# EAGLE board bird_beaks 3.0 (EAGLE 9.6.2)
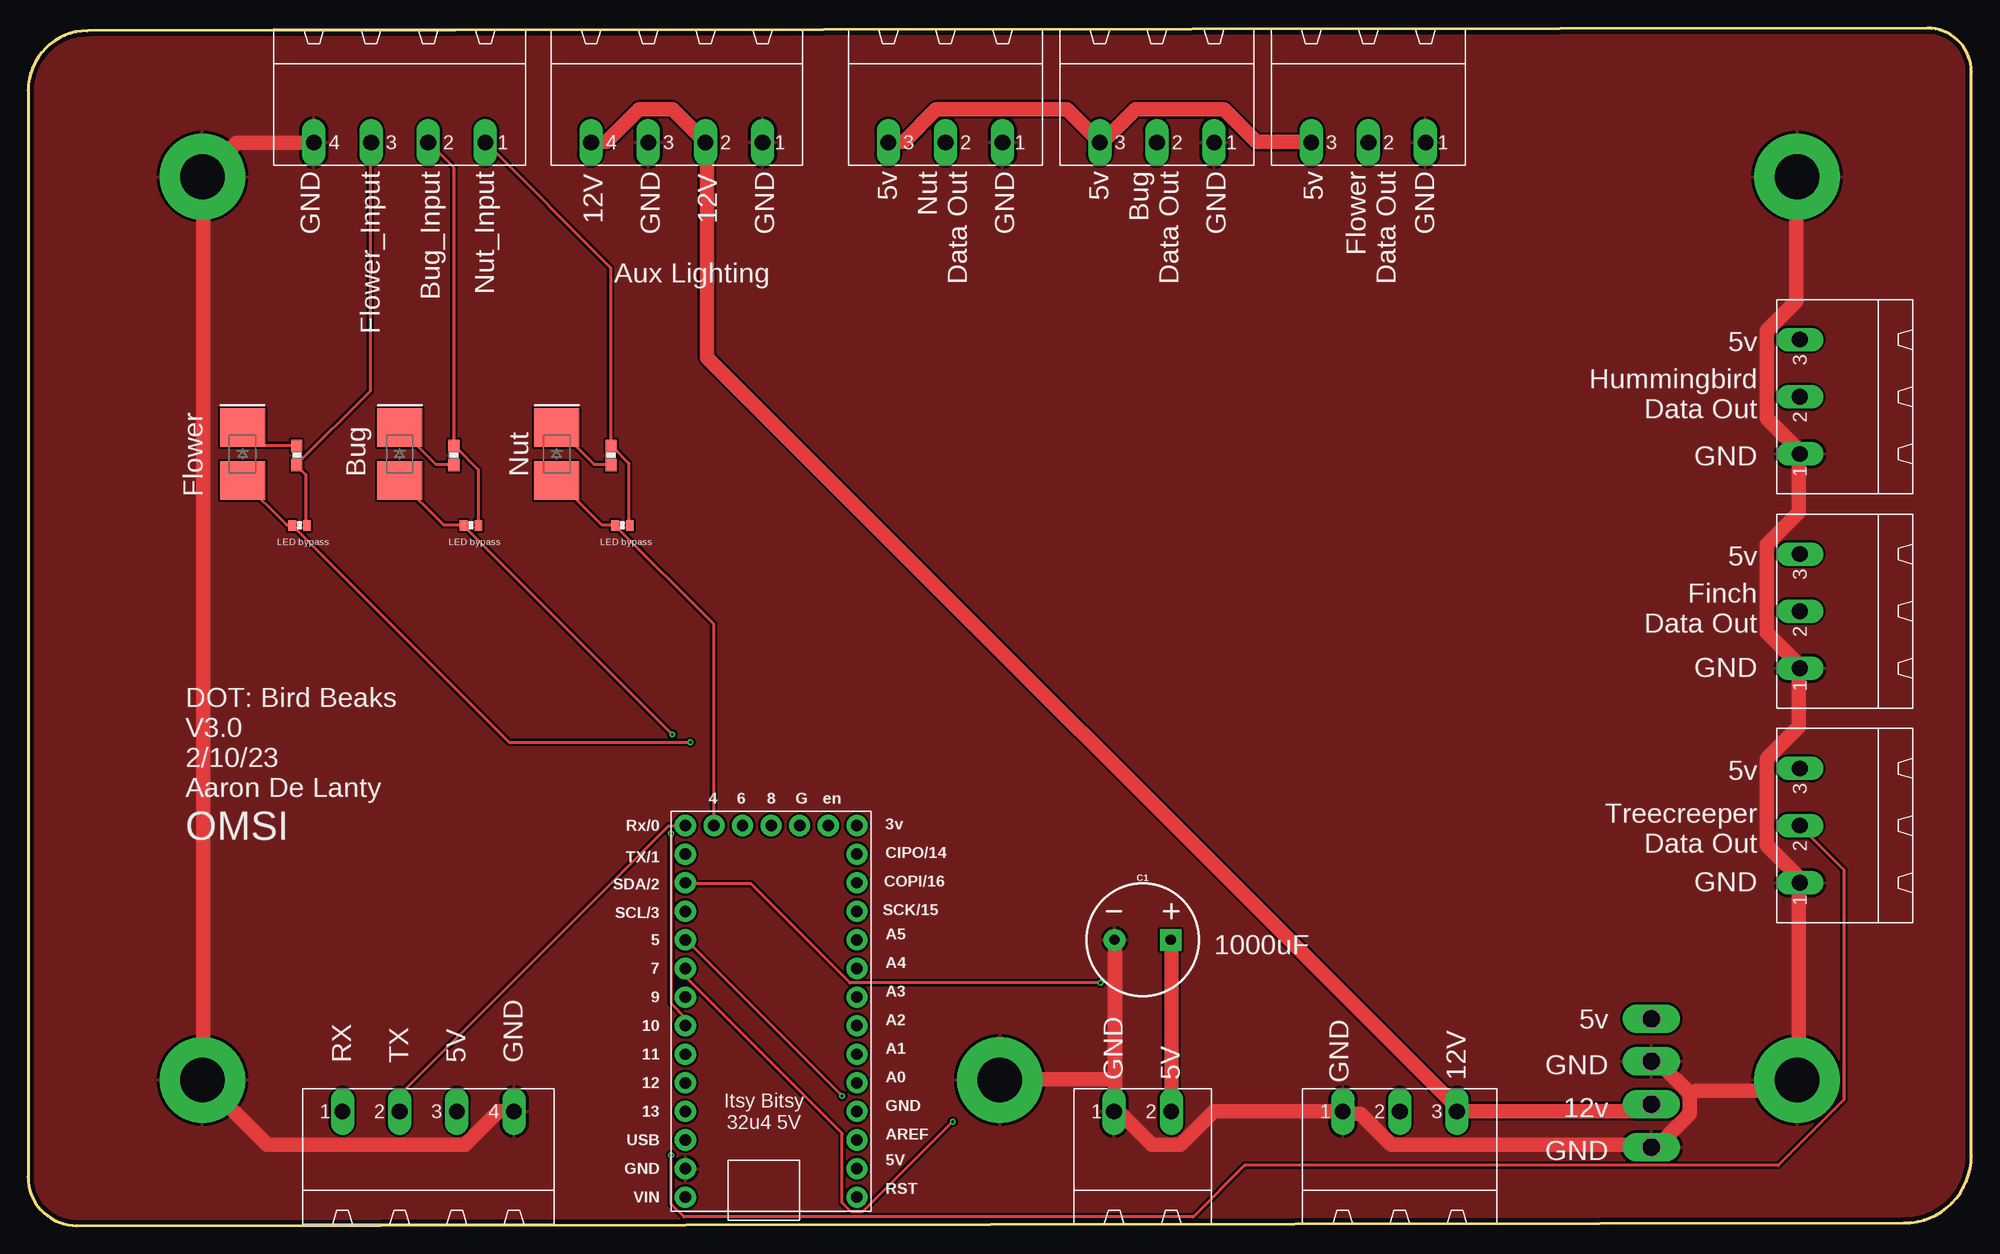
[diagram p0: board, top side]
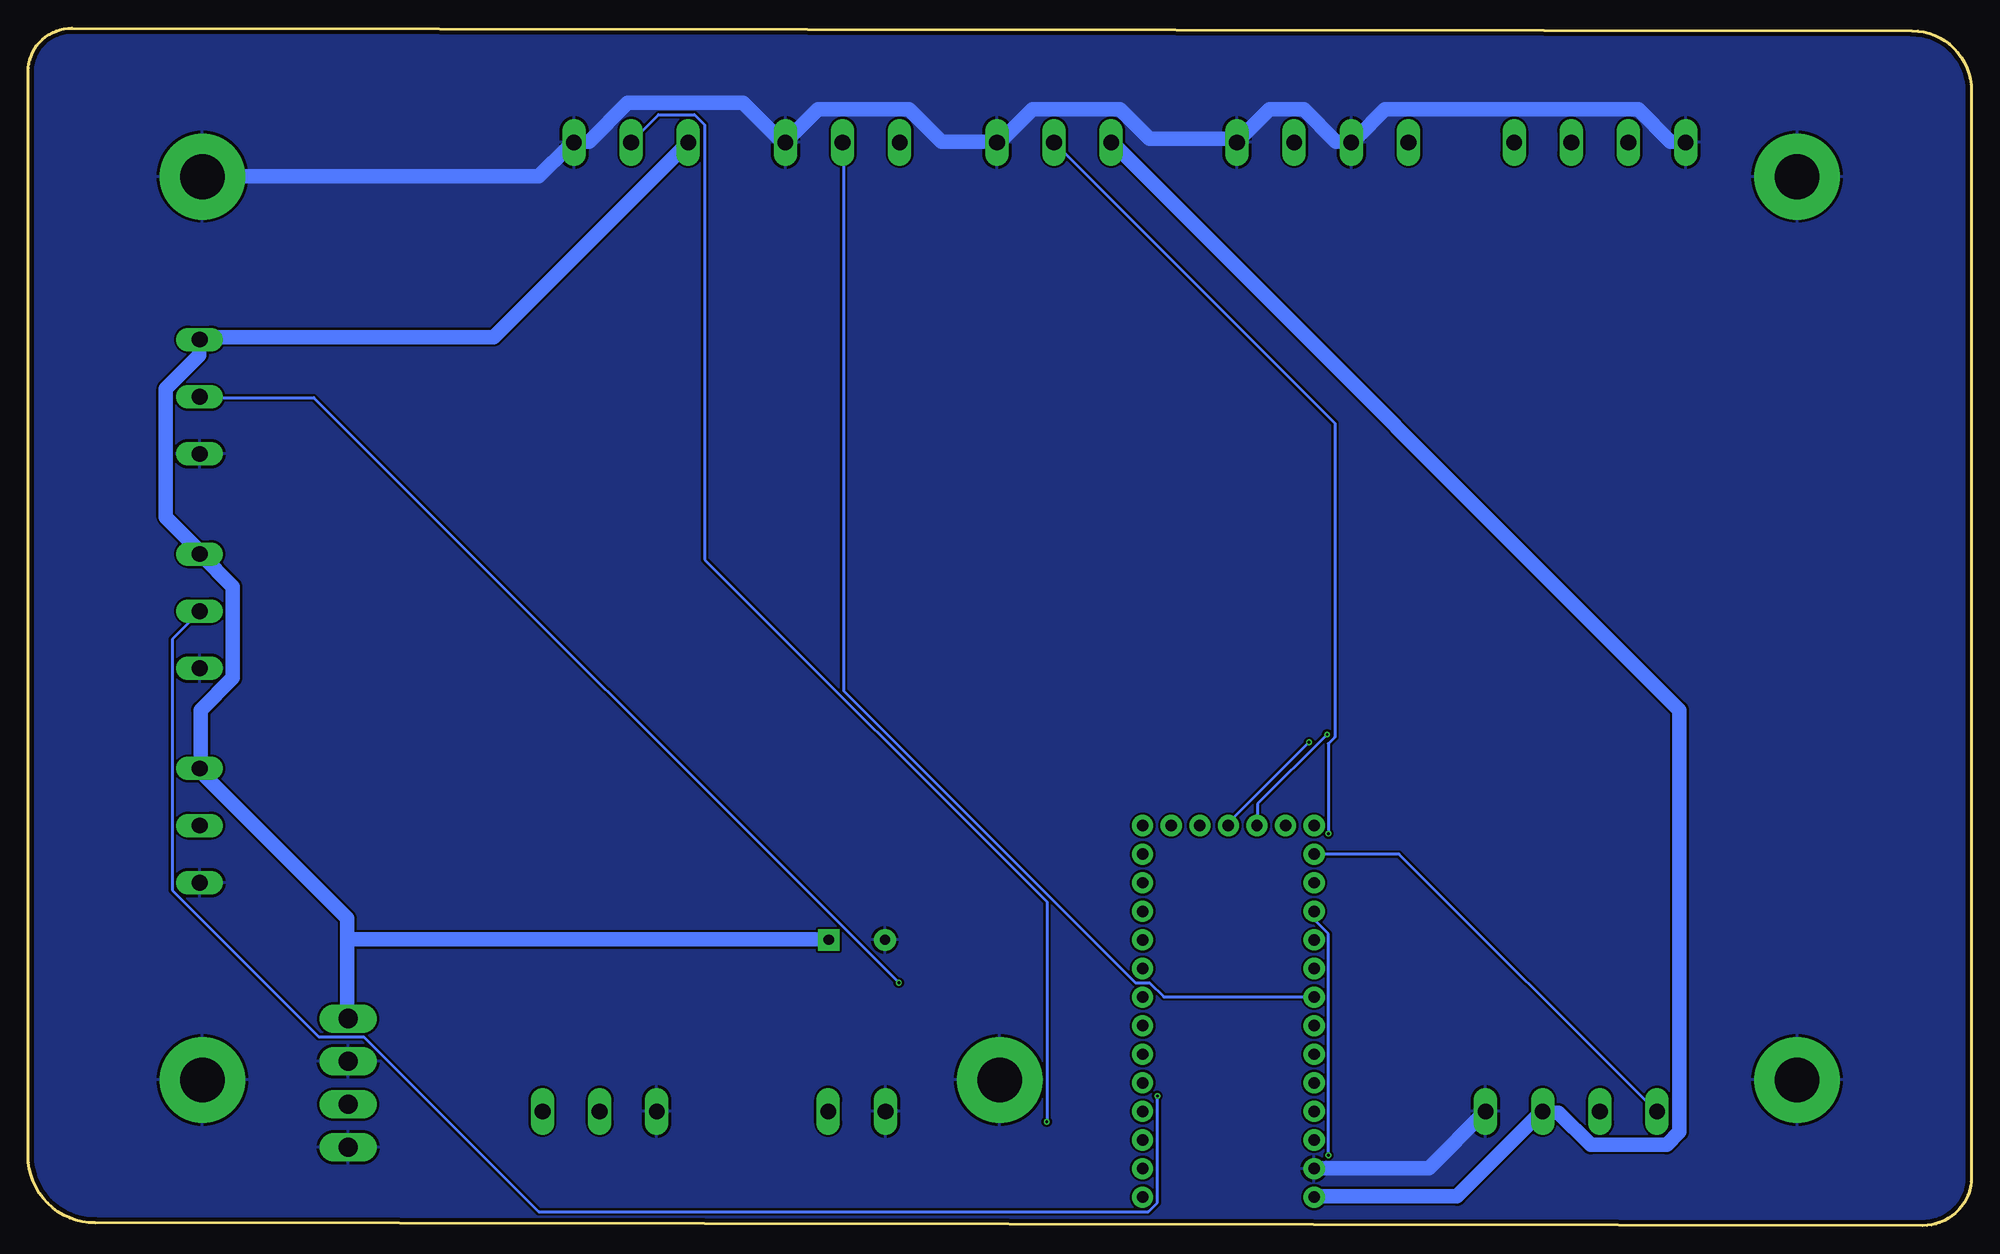
[diagram p1: board, bottom side, seen from below]

Size 172.72 x 106.41 mm. Coordinates in mm from the lower left corner, seen from the top.
Outline: 168.83,106.41 5.28,106.17 arc90 0,100.89 0,4.33 arc90 4.33,0 166.75,0.24 arc90 172.72,6.22 172.72,102.53 arc90 168.83,106.41
Copper layers (1*16): Top 0.035559375mm / dielectric 1.6mm / Bottom 0.035559375mm
Design rules "oshpark-2layer (1) *": minimum track width 10mil, minimum drill 10mil, track to track 8mil, track to pad 8mil, pad to pad 8mil, via to via 8mil, smd to smd 8mil, copper to edge 15mil, drill to drill 6mil, minimum pad ring 5mil, minimum via ring 5mil, stop-mask expansion 2.5mil, vias tented up to drill 25mil, thermal gap 10mil
Net classes: 0 Low Power: width 0.152 mm, drill 0.254 mm; 1 High Power: width 1.27 mm, drill 0.483 mm

## Footprints (pad centres in the part's own frame; a part is rotated, then mirrored left to right if it is on the bottom)
CAP_RADIAL_10MM = drill 0.9 pad 1.93 square: + 2.5,0 | drill 0.9 pad 1.93: - -2.5,0
SPARKFUN-LED_SFH4641-SHORT = smd 3.4 x 4: A -2.35,0; C 2.35,0
SMD_RESISTOR__0603 = smd 1.1 x 1: 1 -0.85,0; 2 0.85,0
SMD_RESISTOR_0402 = smd 0.7 x 0.9: 1 -0.65,0; 2 0.65,0
STANDOFF_ELECTRICAL_5_32 = drill 3.969 pad 7.62: P1 0,0
P2-38-17 = drill 1.702 pad 2.121 long: TP-1 -1.905,0; TP-2 1.905,0
ADAFRUIT_ITSYBITSY = drill 1.016 pad 1.88: 3V -7.62,-16.51; 5V -7.62,13.97; A0 -7.62,6.35; A1 -7.62,3.81; A2 -7.62,1.27; A3 -7.62,-1.27; A4 -7.62,-3.81; A5 -7.62,-6.35; AREF -7.62,11.43; D4 5.08,-16.51; D5 7.62,-6.35; D6 2.54,-16.51; D7 7.62,-3.81; D8 0,-16.51; D9 7.62,-1.27; D10 7.62,1.27; D11 7.62,3.81; D12 7.62,6.35; D13 7.62,8.89; EN -5.08,-16.51; GND@0 -7.62,8.89; GND@1 -2.54,-16.51; GND@2 7.62,13.97; MISO -7.62,-13.97; MOSI -7.62,-11.43; RES -7.62,16.51; RX 7.62,-16.51; SCK -7.62,-8.89; SCL 7.62,-8.89; SDA 7.62,-11.43; TX 7.62,-13.97; USB 7.62,11.43; VIN 7.62,16.51
PHOENIX_508_3PIN = drill 1.397 long: 1 -5.08,5.08; 2 0,5.08; 3 5.08,5.08
PHOENIX_508_2PIN = drill 1.397 long: 1 -2.54,5.08; 2 2.54,5.08
PHOENIX_508_4PIN = drill 1.397 long: 1 -7.62,5.08; 2 -2.54,5.08; 3 2.54,5.08; 4 7.62,5.08

## Placement (x,y rotation side)
C1  1mf  [CAP_RADIAL_10MM]  99.06,25.39 0 top
D1  SPARKFUN-LED_SFH4641SHORT  [SPARKFUN-LED_SFH4641-SHORT]  19.05,68.57 90 top
D2  SPARKFUN-LED_SFH4641SHORT  [SPARKFUN-LED_SFH4641-SHORT]  33.02,68.57 90 top
D3  SPARKFUN-LED_SFH4641SHORT  [SPARKFUN-LED_SFH4641-SHORT]  46.99,68.57 90 top
R1  [SMD_RESISTOR__0603]  23.88,68.45 270 top
R2  [SMD_RESISTOR__0603]  37.85,68.45 90 top
R3  [SMD_RESISTOR__0603]  51.82,68.45 90 top
R4  [SMD_RESISTOR_0402]  39.37,62.22 0 top
R5  [SMD_RESISTOR_0402]  52.83,62.22 0 top
R6  [SMD_RESISTOR_0402]  24.13,62.22 0 top
S1  STANDOFF_ELECTRICAL5-32  [STANDOFF_ELECTRICAL_5_32]  15.49,93.21 0 top
S3  STANDOFF_ELECTRICAL5-32  [STANDOFF_ELECTRICAL_5_32]  157.23,12.95 0 top
S4  STANDOFF_ELECTRICAL5-32  [STANDOFF_ELECTRICAL_5_32]  157.23,93.21 0 top
S6  STANDOFF_ELECTRICAL5-32  [STANDOFF_ELECTRICAL_5_32]  86.36,12.95 0 top
S8  STANDOFF_ELECTRICAL5-32  [STANDOFF_ELECTRICAL_5_32]  15.49,12.95 0 top
TP1  PTR2  [P2-38-17]  144.27,8.88 90 top
TP2  PTR2  [P2-38-17]  144.27,16.5 90 top
U1  ADAFRUIT_ITSYBITSY_5V  [ADAFRUIT_ITSYBITSY]  66.04,19.04 180 top
X1  PHOENIX_508_3PIN  [PHOENIX_508_3PIN]  81.53,101.34 180 top
X2  PHOENIX_508_3PIN  [PHOENIX_508_3PIN]  162.56,54.6 90 top
X3  PHOENIX_508_3PIN  [PHOENIX_508_3PIN]  100.33,101.34 180 top
X4  PHOENIX_508_2PIN  [PHOENIX_508_2PIN]  99.06,5.07 0 top
X5  PHOENIX_508_4PIN  [PHOENIX_508_4PIN]  35.56,5.07 0 top
X6  PHOENIX_508_4PIN  [PHOENIX_508_4PIN]  33.02,101.34 180 top
X7  PHOENIX_508_3PIN  [PHOENIX_508_3PIN]  162.56,35.55 90 top
X8  PHOENIX_508_3PIN  [PHOENIX_508_3PIN]  119.13,101.34 180 top
X9  PHOENIX_508_3PIN  [PHOENIX_508_3PIN]  162.56,73.65 90 top
X10  PHOENIX_508_3PIN  [PHOENIX_508_3PIN]  121.92,5.07 0 top
X11  PHOENIX_508_4PIN  [PHOENIX_508_4PIN]  57.66,101.34 180 top

## Library data of the parts
C1 = OMSI_Default_V1; PROD_ID: CAP-09538
D1-D3 = OMSI_Default_V1; PROD_ID: DIO-11994
R1-R6 U1 = OMSI_Default_V1
S1 S3 S4 S6 S8 = th_libraries
TP1 TP2 = testpad
X1-X3 X7-X10 = OMSI_Default_V1; MF: FARNELL; MPN: 1757255; OC_FARNELL: 3705183; OC_NEWARK: 71C4162
X4 = OMSI_Default_V1; MF: FARNELL; MPN: 1757242; OC_FARNELL: 3705171; OC_NEWARK: 71C4161
X5 X6 X11 = OMSI_Default_V1; MF: FARNELL; MPN: 1757268; OC_FARNELL: 3705195; OC_NEWARK: 71C4163

## Nets
5V [High Power]: C1.+ TP2.TP-2 U1.VIN X1.3 X2.3 X3.3 X4.2 X5.3 X7.3 X8.3 X9.3
12V [High Power]: TP1.TP-2 X10.3 X11.2 X11.4
BUG_INPUT: R2.2 R4.2 X6.2
BUG_OUTPUT: U1.D9 X3.2
FINCH_OUTPUT: U1.D5 X2.2
FLOWER_INPUT: R1.2 R6.2 X6.3
FLOWER_OUTPUT: U1.D7 X8.2
GND [High Power]: C1.- S1.P1 S3.P1 S4.P1 S6.P1 S8.P1 TP1.TP-1 TP2.TP-1 U1.GND@2 X1.1 X2.1 X3.1 X4.1 X5.4 X6.4 X7.1 X8.1 X9.1 X10.1 X11.1 X11.3
HUMMINGBIRD_OUTPUT: U1.SDA X9.2
N$1: D3.C R3.1
N$2: D2.C R2.1
N$3: D1.C R1.1
N$4: D1.A R6.1 U1.D8
N$5: D2.A R4.1 U1.D6
N$6: D3.A R5.1 U1.D4
N$8: U1.TX X5.1
N$10: U1.RX X5.2
NUT_INPUT: R3.2 R5.2 X6.1
NUT_OUTPUT: U1.D10 X1.2
TREECREEPER_OUTPUT: U1.SCL X7.2

## Tracks (layer width: path | path; a pad name or v marks a point on that pad's centre or on a via)
5V
  Top 1.27: C1.+ 101.61,25.36 101.61,10.15 X4.2 | X1.3 76.47,96.34 77.84,96.34 80.7,99.19 92.35,99.19 95.21,96.34 X3.3 95.78,96.56 98.41,99.19 106.3,99.19 109.16,96.34 113.96,96.34 X8.3
  Bottom 1.27: 144.36,25.47 144.36,27.3 157.16,40.1 X7.3 157.39,40.67 157.39,45.82 154.53,48.67 154.53,56.79 157.39,59.65 X2.3 157.73,60.22 160.48,62.96 160.48,74.39 157.5,77.36 157.5,78.73 X9.3 156.93,78.96 131.33,78.96 114.07,96.22 X8.3 | 144.36,25.47 144.36,18.5 TP2.TP-2 | 144.36,25.47 101.61,25.47 C1.+ | U1.VIN 58.41,2.61 45.72,2.61 38.18,10.15 X5.3 37.49,10.04 36.69,10.04 33.83,7.18 27.09,7.18 25.95,8.32 25.95,45.82 76.35,96.22 X1.3
12V
  Top 1.27: X11.4 50.06,96.34 51.44,96.34 54.29,99.19 57.26,99.19 X11.2 60.35,95.65 60.35,77.13 126.76,10.73 X10.3 143.68,10.15 144.25,10.73 TP1.TP-2
BUG_INPUT
  Top 0.254: R4.2 40,62.27 40,67.19 37.95,69.25 R2.2 37.83,69.36 37.83,94.05 35.66,96.22 X6.2
BUG_OUTPUT
  Bottom 0.254: U1.D9 58.52,20.33 71.78,20.33 73.04,21.58 74.3,21.58 100.24,47.53 100.24,96.22 X3.2
FINCH_OUTPUT  (via drill 0.25)
  Top 0.254: v72.35,11.53 58.52,25.36 U1.D5
  Bottom 0.254: v72.35,11.53 72.35,2.04 73.15,1.24 127.33,1.24 142.88,16.78 146.88,16.78 159.91,29.81 159.91,52.1 157.5,54.5 X2.2
FLOWER_INPUT
  Top 0.254: R6.2 24.69,62.27 24.69,66.73 23.89,67.53 R1.2 23.89,67.65 30.4,74.16 30.4,96.22 X6.3
FLOWER_OUTPUT  (via drill 0.25)
  Top 0.254: v82.18,9.24 74.18,1.24 73.15,1.24 72.35,2.04 72.35,8.21 58.52,22.04 58.52,22.84 U1.D7
  Bottom 0.254: v82.18,9.24 82.18,28.78 112.59,59.19 112.59,97.82 113.5,98.74 116.7,98.74 119.1,96.34 X8.2
GND
  Top 1.27: 96.58,13.01 96.58,10.15 X4.1 97.16,9.92 99.9,7.18 102.41,7.18 105.38,10.15 X10.1 117.39,9.92 118.41,9.92 121.16,7.18 143.68,7.18 TP1.TP-1 144.36,7.07 144.82,7.07 147.68,9.92 147.68,11.75 | 96.58,13.01 96.58,25.36 C1.- | 96.58,13.01 86.41,13.01 S6.P1 | 147.68,11.75 144.93,14.5 144.36,14.5 TP2.TP-1 | 147.68,11.75 148.25,11.98 156.02,11.98 156.71,12.67 S3.P1 157.28,13.01 157.39,13.13 157.39,30.38 X7.1 157.28,31.07 154.53,33.81 154.53,41.47 157.39,44.33 157.39,49.47 X2.1 157.16,50.04 154.53,52.67 154.53,60.56 157.39,63.42 157.39,68.56 X9.1 157.16,69.13 154.53,71.76 154.53,79.53 157.16,82.16 157.16,93.14 S4.P1 | X5.4 41.83,10.15 38.86,7.18 21.26,7.18 S8.P1 15.54,13.47 15.54,92.68 S1.P1 15.54,93.25 18.52,96.22 25.38,96.22 X6.4
  Bottom 1.27: U1.GND@2 58.41,5.12 48.23,5.12 43.2,10.15 X5.4 | X6.4 25.49,96.34 26.75,96.34 29.6,99.19 52.12,99.19 54.63,96.68 X11.3 55.21,96.34 56.46,96.34 59.32,99.19 62.41,99.19 65.27,96.34 X11.1 65.84,96.56 73.04,96.56 75.67,99.19 83.44,99.19 86.07,96.56 X1.1 86.64,96.34 91.55,96.34 94.41,99.19 102.53,99.19 105.38,96.34 X3.1 105.96,96.56 109.16,99.76 119.44,99.76 122.87,96.34 124.13,96.34 X8.1 124.7,95.88 127.33,93.25 157.16,93.25 S4.P1
  pour Top: -5.08,111.75 173.99,111.75 176.53,109.21 176.53,-1.28 175.26,-2.55 -2.54,-2.55 -5.08,-0.01
  pour Bottom: -2.54,114.29 -2.54,-2.55 -1.27,-3.82 168.91,-3.82 173.99,1.26 173.99,113.02 172.72,114.29
HUMMINGBIRD_OUTPUT  (via drill 0.25)
  Top 0.254: v95.33,21.58 73.04,21.58 64.24,30.38 58.52,30.38 U1.SDA
  Bottom 0.254: v95.33,21.58 147.33,73.59 157.39,73.59 X9.2
N$1
  Top 0.254: R3.1 51.78,67.65 50.29,67.65 47.09,70.85 D3.C
N$2
  Top 0.254: R2.1 37.83,67.65 36.23,67.65 33.03,70.85 D2.C
N$3
  Top 0.254: R1.1 23.77,69.36 20.57,69.36 19.09,70.85 D1.C
N$4  (via drill 0.25)
  Top 0.254: D1.A 19.09,66.16 22.97,62.27 23.43,62.27 R6.1 23.55,62.16 42.75,42.96 v58.86,42.96
  Bottom 0.254: v58.86,42.96 65.95,35.87 65.95,35.64 U1.D8
N$5  (via drill 0.25)
  Top 0.254: D2.A 33.03,66.16 36.92,62.27 38.63,62.27 R4.1 38.75,62.16 v57.26,43.64
  Bottom 0.254: v57.26,43.64 63.44,37.47 63.44,35.64 U1.D6
N$6
  Top 0.254: D3.A 47.09,66.16 50.98,62.27 52.12,62.27 R5.1 52.23,62.16 60.92,53.47 60.92,35.64 U1.D4
N$8
  Bottom 0.254: U1.TX 50.86,33.01 28,10.15 X5.1
N$10
  Top 0.254: U1.RX 58.41,35.53 56.92,35.53 33.03,11.64 33.03,10.15 X5.2
NUT_INPUT
  Top 0.254: R5.2 53.38,62.27 53.38,67.76 51.89,69.25 R3.2 51.78,69.36 51.78,85.13 40.69,96.22 X6.1
NUT_OUTPUT  (via drill 0.25)
  Top 0.254: v57.15,34.84 57.15,19.75 58.41,18.5 58.41,17.81 U1.D10
  Bottom 0.254: v57.15,34.84 57.15,42.84 56.58,43.41 56.58,71.3 X1.2
TREECREEPER_OUTPUT  (via drill 0.25)
  Top 0.254: v57.15,6.27 57.15,1.92 58.29,0.78 103.56,0.78 108.13,5.35 155.56,5.35 161.39,11.18 161.39,31.64 X7.2
  Bottom 0.254: v57.15,6.27 57.15,25.93 58.41,27.18 58.41,27.87 U1.SCL

## Text on the board
tNames: GND | Flower_Input | Bug_Input | Nut_Input | 12V | GND | 12V | GND | 5v | Nut / Data Out | GND | 5v | Bug / Data Out | GND | 5v | Flower / Data Out | GND | Aux Lighting | 5v | Hummingbird / Data Out | GND | Bug | Nut | Flower | LED bypass | LED bypass | LED bypass | 5v | Finch / Data Out | GND | 5v | DOT: Bird Beaks / V3.0 / 2/10/23 / Aaron De Lanty | Treecreeper / Data Out | OMSI | GND | 1000uF | 5v | GND | RX | TX | 5V | GND | GND | 5V | GND | 12V | 12v | GND